# EAGLE board auxDaqUnitBottom2022 (EAGLE 9.6.2)
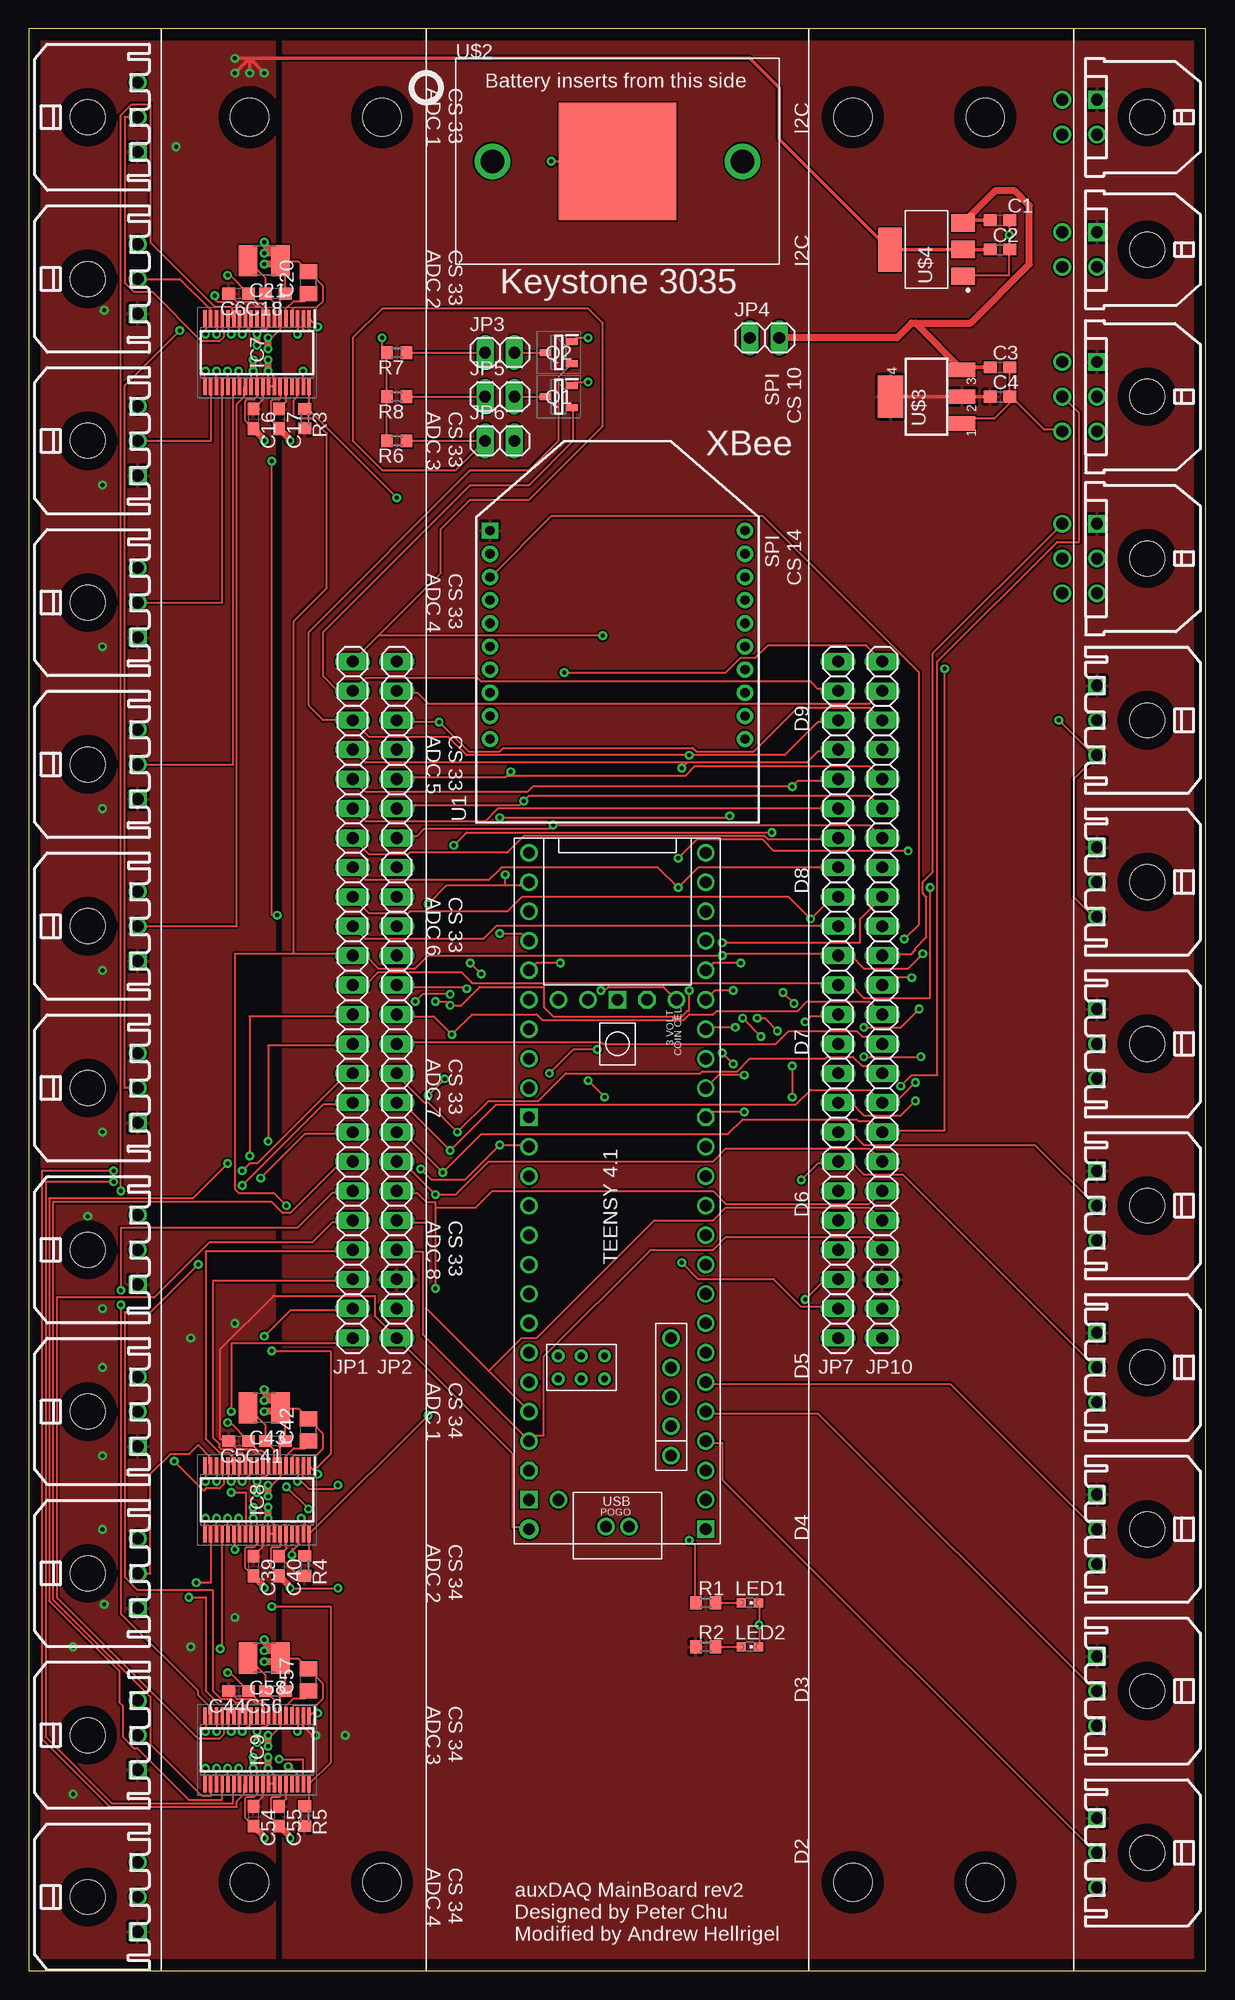
[diagram p0: board, top side]
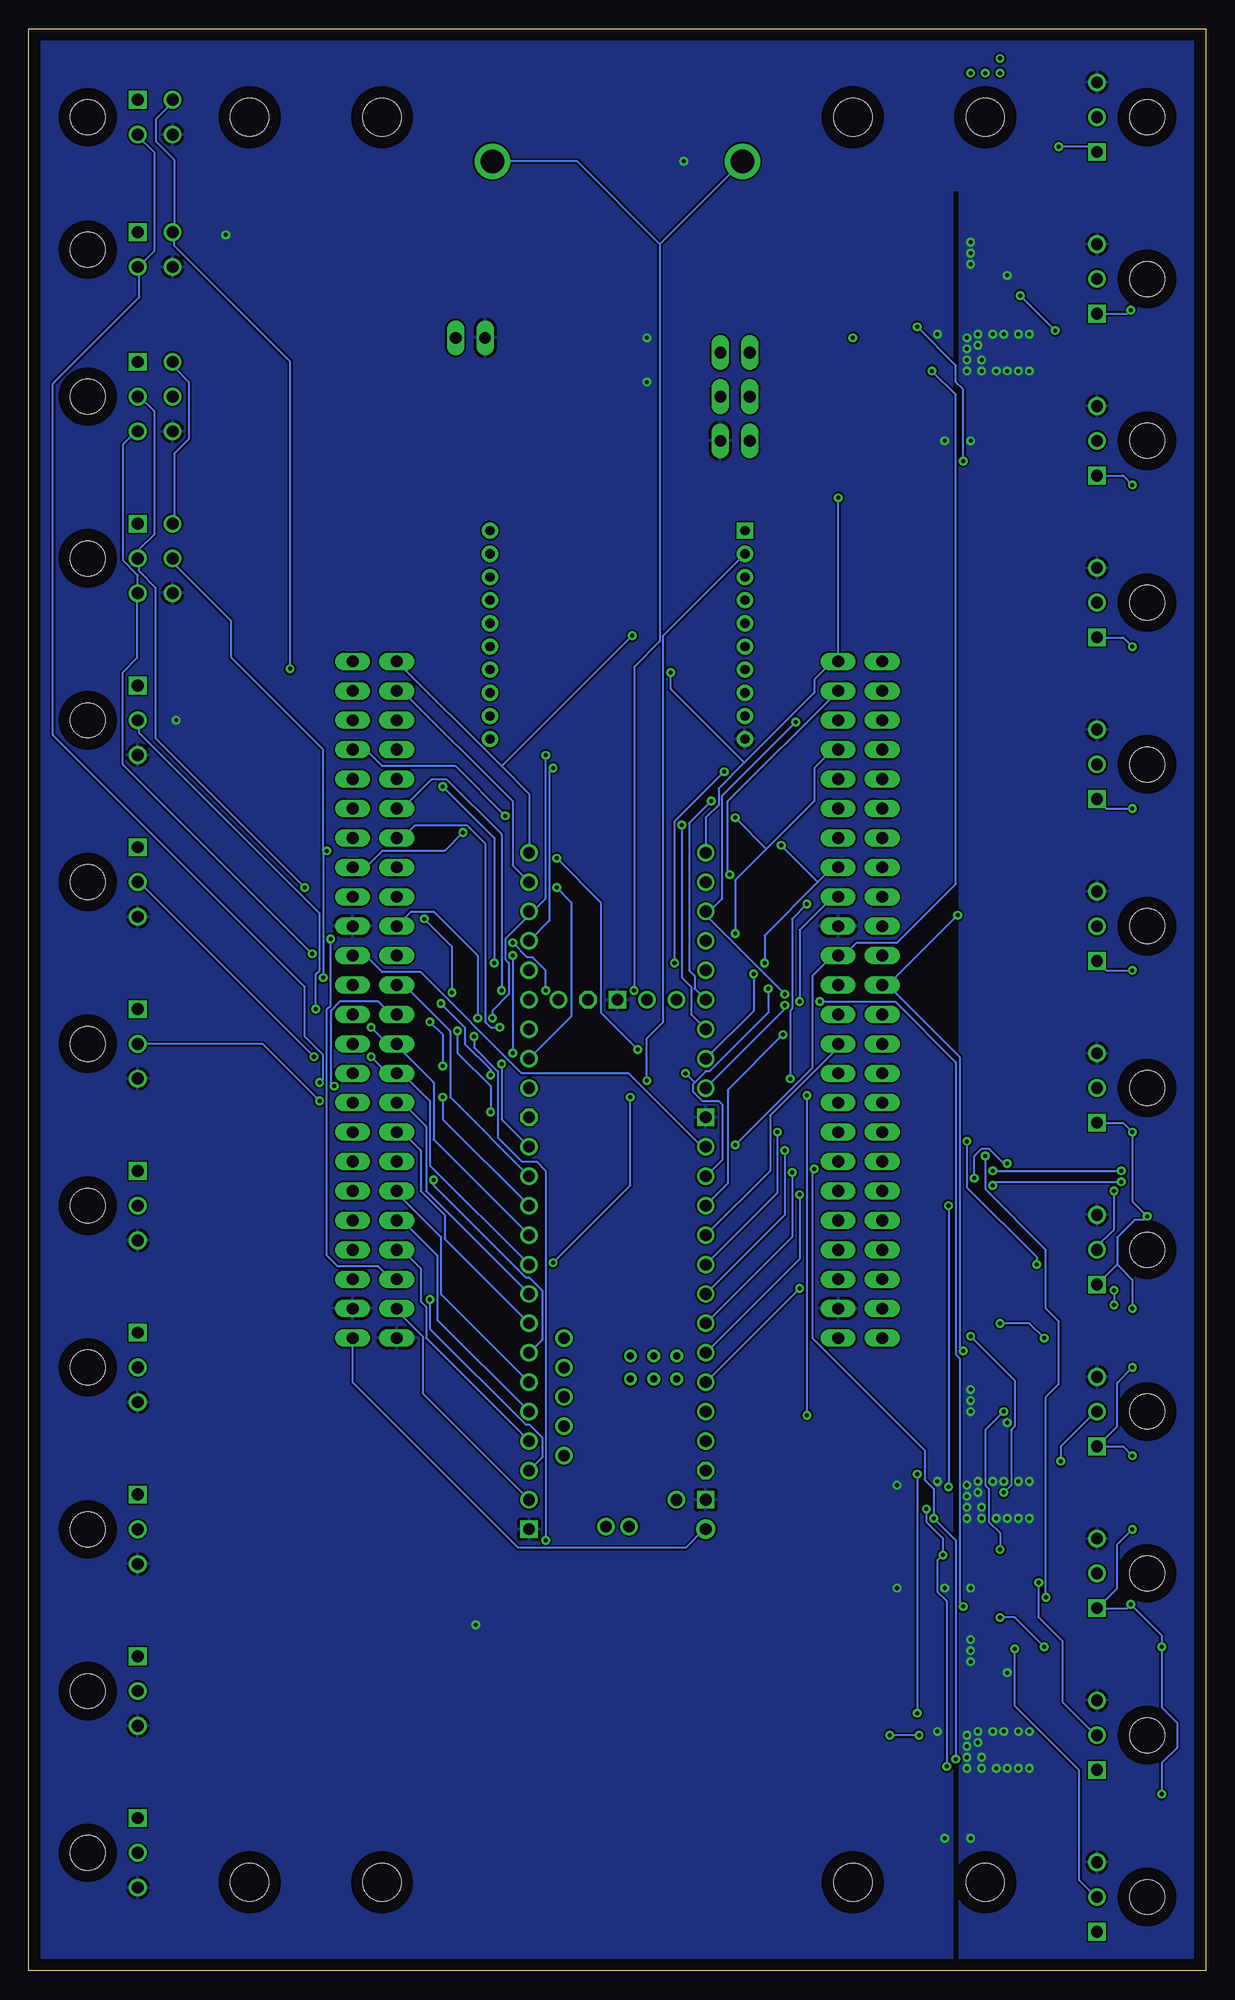
[diagram p1: board, bottom side, seen from below]

Size 101.6 x 167.64 mm. Coordinates in mm from the lower left corner, seen from the top.
Outline: 0,0 101.6,0 101.6,167.64 0,167.64 0,0
Copper layers (1*16): Top 0.035mm / dielectric 1.5mm / Bottom 0.035mm
Design rules "default": minimum track width 6mil, minimum drill 0.35mm, track to track 6mil, track to pad 6mil, pad to pad 6mil, via to via 6mil, smd to smd 6mil, copper to edge 40mil, drill to drill 6mil, minimum pad ring 10mil, minimum via ring 8mil, stop-mask expansion 4mil, vias tented up to drill 0mil, thermal gap 10mil
Holes 3.3 mm at 30.48,160.02 30.48,7.62 82.55,7.62 82.55,160.02 19.05,7.62 71.12,7.62 71.12,160.02 19.05,160.02

## Footprints (pad centres in the part's own frame; a part is rotated, then mirrored left to right if it is on the bottom)
43650-0300 = drill 1.02 square: P$1 3,4.32 | drill 1.02: P$2 0,4.32; P$3 -3,4.32 | hole 3: 0,0
C0603 = smd 1.1 x 1: 1 -0.85,0; 2 0.85,0
C0805 = smd 1.3 x 1.5: 1 -0.95,0; 2 0.95,0
C1210 = smd 1.6 x 2.7: 1 -1.4,0; 2 1.4,0
43045-0600 = drill 1.02 square: P$1 3,4.32 | drill 1.02: P$2 0,4.32; P$3 -3,4.32; P$4 3,7.32; P$5 0,7.32; P$6 -3,7.32 | hole 3: 0,0
43045-0400 = drill 1.02 square: P$1 1.5,4.32 | drill 1.02: P$2 -1.5,4.32; P$3 1.5,7.32; P$4 -1.5,7.32 | hole 3: 0,0
SOP50P640X120-38N = smd 1.475 x 0.3: 1 -2.938,4.5; 2 -2.938,4; 3 -2.938,3.5; 4 -2.938,3; 5 -2.938,2.5; 6 -2.938,2; 7 -2.938,1.5; 8 -2.938,1; 9 -2.938,0.5; 10 -2.938,0; 11 -2.938,-0.5; 12 -2.938,-1; 13 -2.938,-1.5; 14 -2.938,-2; 15 -2.938,-2.5; 16 -2.938,-3; 17 -2.938,-3.5; 18 -2.938,-4; 19 -2.938,-4.5; 20 2.938,-4.5; 21 2.938,-4; 22 2.938,-3.5; 23 2.938,-3; 24 2.938,-2.5; 25 2.938,-2; 26 2.938,-1.5; 27 2.938,-1; 28 2.938,-0.5; 29 2.938,0; 30 2.938,0.5; 31 2.938,1; 32 2.938,1.5; 33 2.938,2; 34 2.938,2.5; 35 2.938,3; 36 2.938,3.5; 37 2.938,4; 38 2.938,4.5
1X24 = drill 1.016 long: 1 -29.21,0; 2 -26.67,0; 3 -24.13,0; 4 -21.59,0; 5 -19.05,0; 6 -16.51,0; 7 -13.97,0; 8 -11.43,0; 9 -8.89,0; 10 -6.35,0; 11 -3.81,0; 12 -1.27,0; 13 1.27,0; 14 3.81,0; 15 6.35,0; 16 8.89,0; 17 11.43,0; 18 13.97,0; 19 16.51,0; 20 19.05,0; 21 21.59,0; 22 24.13,0; 23 26.67,0; 24 29.21,0
1X02 = drill 1.016 long: 1 -1.27,0; 2 1.27,0
LED-603 = smd 0.8 x 0.8: A 0,-0.75; C 0,0.75
BSS64AHZGT116 = smd 1 x 0.6: 1 -1.15,-0.95; 2 -1.15,0.95; 3 1.15,0
R0603 = smd 1 x 1.1: 1 -0.85,0; 2 0.85,0
XBEE_PRO_S3B = drill 0.8 pad 1.4 square: 1 -11,8.75 | drill 0.8 pad 1.4: 2 -11,6.75; 3 -11,4.75; 4 -11,2.75; 5 -11,0.75; 6 -11,-1.25; 7 -11,-3.25; 8 -11,-5.25; 9 -11,-7.25; 10 -11,-9.25; 11 11,-9.25; 12 11,-7.25; 13 11,-5.25; 14 11,-3.25; 15 11,-1.25; 16 11,0.75; 17 11,2.75; 18 11,4.75; 19 11,6.75; 20 11,8.75
TEENSY41 = drill 1: 0-RX1/CS1/CRX2 -27.94,-7.62; 1-TX1/MISO1/CTX2 -25.4,-7.62; 2-OUT2 -22.86,-7.62; 3-LRCLK2 -20.32,-7.62; 4-BCLK2 -17.78,-7.62; 5-IN2 -15.24,-7.62; 6-OUT1D -12.7,-7.62; 7-RX2/OUT1A -10.16,-7.62; 8-TX2/IN2 -7.62,-7.62; 9-OUT1C -5.08,-7.62; 10-CS\MQSR -2.54,-7.62; 11-MOSI/CTX1 0,-7.62; 12-MISO/MQSL 2.54,-7.62; 13-SCK/LED 2.54,7.62; 14-A0/TX3/SPDIF_OUT 0,7.62; 15-A1/RX3/SPDIF_IN -2.54,7.62; 16-A2/RX4/SCL1 -5.08,7.62; 17-A3/TX4/SDA1 -7.62,7.62; 18-A4/SDA0 -10.16,7.62; 19-A5/SCL0 -12.7,7.62; 20-A6/TX5/LRCLK1 -15.24,7.62; 21-A7/RX5/BCLK1 -17.78,7.62; 22-A8/CTX1 -20.32,7.62; 23-A9/CRX1/MCLK1 -22.86,7.62; 24-A10/TX6/SCL2 7.62,-7.62; 25-A11/RX6/SDA2 10.16,-7.62; 26-A12/MOSI1 12.7,-7.62; 27-A13/SCK1 15.24,-7.62; 28-RX7 17.78,-7.62; 29-TX7 20.32,-7.62; 30-CRX3 22.86,-7.62; 31-CTX3 25.4,-7.62; 32-OUT1B 27.94,-7.62; 33-MCLK2 27.94,7.62; 34-RX8 25.4,7.62; 35-TX8 22.86,7.62; 36-PWM 20.32,7.62; 37-PWM 17.78,7.62; 38-A14/CS/IN1 15.24,7.62; 39-A15/CS/OUT1A 12.7,7.62; 40-A16/CS1 10.16,7.62; 41-A17/MISO1 7.62,7.62; +5V -24.13,-4.62; D+ -30.25,-1; D- -30.25,1; DM -21.59,-4.62; DP -19.05,-4.62; GND4 -16.51,-4.62; GND5 -13.97,-4.62; ON/OFF 15.24,5.08; PROGRAM 15.24,2.54; VBAT 15.24,-5.08; VUSB -27.94,5.08 | drill 1 octagon: 3V3-1 5.08,-7.62; 3V3-2 15.24,-2.54; 3V3-3 -25.4,7.62 | drill 0.6: G -15.51,3.12; LED -17.51,3.12; R+ -17.51,5.12; R- -15.51,5.12; T+ -15.51,1.12; T- -17.51,1.12 | drill 1 square: GND1 -30.48,-7.62; GND2 15.24,0; GND3 5.08,7.62; GND6 -27.94,7.62 | drill 1 pad 1.676: VIN -30.48,7.62
KEYSTONE3035 = smd 10.16 x 10.16: NEG 0,0 | drill 2.032: VCC1 -10.795,0; VCC2 10.795,0
SOT223 = smd 1.219 x 2.235: 1 -2.311,-3.099; 2 0,-3.099; 3 2.311,-3.099 | smd 3.6 x 2.2: 4 0,3.099
SOT230P700X180-4N = smd 1.5 x 2: 1 -2.3,-3.15; 2 0,-3.15; 3 2.3,-3.15 | smd 3.8 x 2: 4 0,3.15

## Placement (x,y rotation side)
A0  [43650-0300]  5.08,160.02 270 top
A1  [43650-0300]  5.08,146.05 270 top
A2  [43650-0300]  5.08,132.08 270 top
A3  [43650-0300]  5.08,118.11 270 top
A4  [43650-0300]  5.08,104.14 270 top
A5  [43650-0300]  5.08,90.17 270 top
A6  [43650-0300]  5.08,76.2 270 top
A7  [43650-0300]  5.08,62.23 270 top
A8  [43650-0300]  5.08,48.26 270 top
A9  [43650-0300]  5.08,34.29 270 top
A10  [43650-0300]  5.08,20.32 270 top
A11  [43650-0300]  5.08,6.35 270 top
C1  .1uf  [C0603]  83.82,151.13 0 top
C2  .1uf  [C0603]  83.82,148.59 0 top
C3  .1uf  [C0603]  83.82,138.43 0 top
C4  .1uf  [C0603]  83.82,135.89 0 top
C5  1uF  [C0603]  18.1,45.72 180 top
C6  1uF  [C0603]  18.1,144.78 180 top
C16  1uF  [C0603]  19.37,133.99 270 top
C17  10uF  [C0603]  21.59,133.99 270 top
C18  1uF  [C0603]  21.27,144.78 180 top
C20  10uF  [C0805]  24.13,145.73 90 top
C21  22uF  [C1210]  20.32,147.64 180 top
C39  1uF  [C0603]  19.37,34.92 270 top
C40  10uF  [C0603]  21.59,34.92 270 top
C41  1uF  [C0603]  21.27,45.72 180 top
C42  10uF  [C0805]  24.13,46.67 90 top
C43  22uF  [C1210]  20.32,48.58 180 top
C44  1uF  [C0603]  18.1,24.13 180 top
C54  1uF  [C0603]  19.37,13.34 270 top
C55  10uF  [C0603]  21.59,13.34 270 top
C56  1uF  [C0603]  21.27,24.13 180 top
C57  10uF  [C0805]  24.13,25.08 90 top
C58  22uF  [C1210]  20.32,26.99 180 top
CS=10  [43045-0600]  96.52,135.89 90 top
CS=11  [43045-0600]  96.52,121.92 90 top
D1  [43650-0300]  96.52,10.16 90 top
D2  [43650-0300]  96.52,24.13 90 top
D3  [43650-0300]  96.52,38.1 90 top
D4  [43650-0300]  96.52,52.07 90 top
D5  [43650-0300]  96.52,66.04 90 top
D6  [43650-0300]  96.52,80.01 90 top
D7  [43650-0300]  96.52,93.98 90 top
D8  [43650-0300]  96.52,107.95 90 top
I2C1  [43045-0400]  96.52,160.02 90 top
I2C2  [43045-0400]  96.52,148.59 90 top
IC7  ADC_ADS8688IDBTR  [SOP50P640X120-38N]  19.68,139.7 270 top
IC8  ADC_ADS8688IDBTR  [SOP50P640X120-38N]  19.68,40.64 270 top
IC9  ADC_ADS8688IDBTR  [SOP50P640X120-38N]  19.68,19.05 270 top
JP1  [1X24]  27.94,83.82 90 top
JP2  [1X24]  31.75,83.82 90 top
JP3  [1X02]  40.64,139.7 0 top
JP4  [1X02]  63.5,140.97 0 top
JP5  [1X02]  40.64,135.89 0 top
JP6  [1X02]  40.64,132.08 0 top
JP7  [1X24]  69.85,83.82 90 top
JP10  [1X24]  73.66,83.82 90 top
LED1  AMBER  [LED-603]  62.23,31.75 270 top
LED2  GREEN  [LED-603]  62.23,27.94 270 top
Q1  MOSFET_N-TYPE_RK7002BMT116  [BSS64AHZGT116]  45.72,135.89 180 top
Q2  MOSFET_N-TYPE_RK7002BMT116  [BSS64AHZGT116]  45.72,139.7 180 top
R1  220  [R0603]  58.42,31.75 0 top
R2  220  [R0603]  58.42,27.94 0 top
R3  10k  [R0603]  23.81,133.99 270 top
R4  10k  [R0603]  23.81,34.92 270 top
R5  10k  [R0603]  23.81,13.34 270 top
R6  10k  [R0603]  31.75,132.08 180 top
R7  [R0603]  31.75,139.7 180 top
R8  [R0603]  31.75,135.89 180 top
U1  XBEE_PRO_S3B  [XBEE_PRO_S3B]  50.8,115.57 0 top
U$1  TEENSY41  [TEENSY41]  50.8,68.58 90 top
U$2  KEYSTONE3035  [KEYSTONE3035]  50.8,156.21 0 top
U$3  REG_3V3_LMS8117A  [SOT223]  77.47,135.89 90 top
U$4  REG_5V_LDL1117S50R  [SOT230P700X180-4N]  77.47,148.59 90 top

## Library data of the parts
A0 A1-A11 CS=10 CS=11 D1-D8 I2C1 I2C2 = GTOR - Microfit Connector
C1-C6 C16-C18 C20 C21 C39-C44 C54-C58 = GTOR - Passive Components; SPICEPREFIX: C
IC7-IC9 = GTOR - Active Components; ARROW_PART_NUMBER: ADS8688IDBTR; ARROW_PRICE-STOCK: https://www.arrow.com/en/products/ads8688idbtr/texas-instruments?region=nac; DESCRIPTION: Octal Channel Single ADC SAR 500ksps 16-bit Serial 38-Pin TSSOP T/R; HEIGHT: 1.2mm; MANUFACTURER_NAME: Texas Instruments; MANUFACTURER_PART_NUMBER: ADS8688IDBTR; MOUSER_PART_NUMBER: 595-ADS8688IDBTR; MOUSER_PRICE-STOCK: https://www.mouser.co.uk/ProductDetail/Texas-Instruments/ADS8688IDBTR?qs=bZA2O%252B%252B1GJuPFEagMJIgMw%3D%3D
JP1-JP7 JP10 = GTOR - Connectors
LED1 LED2 U$2 = GTOR - Passive Components
Q1 Q2 = GTOR - Active Components; DESCRIPTION: 2.5V Drive Nch MOSFET: MOSFETs are made as ultra-low ON-resistance by the micro-processing technologies suitable for mobilr equipment for low current consumption. In wide lineup including compact type, high-power type and complex type to meet in the market.; HEIGHT: 1.2mm; MANUFACTURER_NAME: ROHM Semiconductor; MANUFACTURER_PART_NUMBER: RK7002BMT116; MOUSER_PART_NUMBER: 755-RK7002BMT116; MOUSER_PRICE-STOCK: https://www.mouser.co.uk/ProductDetail/ROHM-Semiconductor/RK7002BMT116?qs=npTsUczJOtO4aXz%2Fx%2FNVUw%3D%3D
R1-R8 = GTOR - Passive Components; SPICEPREFIX: R
U1 = GTOR - Microcontroller; DESCRIPTION: General ISM < 1GHz Transceiver Module 900MHz Antenna Not Included, RP-SMA Through Hole; DIGI-KEY_PART_NUMBER: 602-1293-ND; MF: Digi International; MP: XBP9B-XCST-001; PACKAGE: Module Digi International
U$1 = GTOR - Microcontroller
U$3 U$4 = GTOR - Active Components

## Nets
2: D1.P$2 JP7.4 U$1.2-OUT2
3: D2.P$2 JP7.5 U$1.3-LRCLK2
3V3: R6.2 R7.2 R8.2
3V3-1: JP1.15 JP7.15 U$1.3V3-1
3V3-2: U$1.3V3-2
3V3-3: U$1.3V3-3
4: D3.P$2 JP7.6 U$1.4-BCLK2
5: D4.P$2 JP7.7 U$1.5-IN2
5V: U$1.+5V
6: D5.P$2 JP7.8 U$1.6-OUT1D
7: D6.P$2 JP7.9 U$1.7-RX2/OUT1A
8: D7.P$2 JP7.10 U$1.8-TX2/IN2
9: D8.P$2 JP7.11 U$1.9-OUT1C
10: CS=10.P$5 JP7.12 U$1.10-CS\MQSR
14: CS=11.P$5 JP2.13 JP10.13 U$1.14-A0/TX3/SPDIF_OUT
15: JP2.12 JP10.12 U$1.15-A1/RX3/SPDIF_IN
16: JP2.11 JP10.11 U$1.16-A2/RX4/SCL1
17: JP2.10 JP10.10 U$1.17-A3/TX4/SDA1
20: JP2.7 JP10.7 U$1.20-A6/TX5/LRCLK1
21: JP2.6 JP10.6 U$1.21-A7/RX5/BCLK1
22: JP2.5 JP10.5 U$1.22-A8/CTX1
23: JP2.4 JP10.4 U$1.23-A9/CRX1/MCLK1
24: JP1.16 JP7.16 U$1.24-A10/TX6/SCL2
25: JP1.17 JP7.17 U$1.25-A11/RX6/SDA2
26: JP1.18 JP7.18 U$1.26-A12/MOSI1
27: JP1.19 JP7.19 U$1.27-A13/SCK1
28: JP1.20 JP7.20 U$1.28-RX7
29: JP1.21 JP7.21 U$1.29-TX7
30: JP1.22 JP7.22 Q2.2 R1.1 U$1.30-CRX3
31: JP1.23 JP7.23 Q1.2 U$1.31-CTX3
32: JP1.24 JP6.1 JP7.24 R6.1 U$1.32-OUT1B
33: IC7.38 JP2.24 JP10.24 R3.1 U$1.33-MCLK2
34: IC8.38 JP2.23 JP10.23 R4.1 U$1.34-RX8
35: IC9.38 JP2.22 JP10.22 R5.1 U$1.35-TX8
36: JP2.21 JP10.21 U$1.36-PWM
37: JP2.20 JP10.20 U$1.37-PWM
38: JP2.19 JP10.19 U$1.38-A14/CS/IN1
39: JP2.18 JP10.18 U$1.39-A15/CS/OUT1A
40: JP2.17 JP10.17 U$1.40-A16/CS1
41: JP2.16 JP10.16 U$1.41-A17/MISO1
+3V3: C4.1 C17.1 C40.1 C55.1 CS=10.P$1 CS=11.P$1 D1.P$1 D2.P$1 D3.P$1 D4.P$1 D5.P$1 D6.P$1 D7.P$1 D8.P$1 I2C1.P$1 I2C2.P$1 IC7.2 IC7.34 IC8.2 IC8.34 IC9.2 IC9.34 JP2.3 JP10.3 R2.1 R3.2 R4.2 R5.2 U1.1 U$3.2 U$3.4
+5V: A0.P$1 A1.P$1 A2.P$1 A3.P$1 A4.P$1 A5.P$1 A6.P$1 A7.P$1 A8.P$1 A9.P$1 A10.P$1 A11.P$1 C2.1 C5.2 C6.2 C16.1 C39.1 C44.2 C54.1 IC7.9 IC7.30 IC8.9 IC8.30 IC9.9 IC9.30 JP2.1 JP10.1 U$1.VIN U$4.2 U$4.4
+12V: C1.1 C3.1 JP4.2 U$3.3 U$4.3
ADC1: A0.P$2 IC7.16
ADC2: A1.P$2 IC7.18
ADC3: A2.P$2 IC7.21
ADC4: A3.P$2 IC7.23
ADC5: A4.P$2 IC7.25
ADC6: A5.P$2 IC7.27
ADC7: A6.P$2 IC7.12
ADC8: A7.P$2 IC7.14
ADC9: A8.P$2 IC8.16
ADC10: A9.P$2 IC8.18
ADC11: A10.P$2 IC8.21
ADC12: A11.P$2 IC8.23
ADC13: IC8.25 JP1.1
ADC14: IC8.27 JP1.2
ADC15: IC8.12 JP1.3
ADC16: IC8.14 JP1.4
ADC17: IC9.16 JP1.5
ADC18: IC9.18 JP1.6
ADC19: IC9.21 JP1.7
ADC20: IC9.23 JP1.8
ADC21: IC9.25 JP1.9
ADC22: IC9.27 JP1.10
ADC23: IC9.12 JP1.11
ADC24: IC9.14 JP1.12
D+: U$1.D+
D-: U$1.D-
DM: U$1.DM
DP: U$1.DP
G: U$1.G
GND: A0.P$3 A1.P$3 A2.P$3 A3.P$3 A4.P$3 A5.P$3 A6.P$3 A7.P$3 A8.P$3 A9.P$3 A10.P$3 A11.P$3 C1.2 C2.2 C3.2 C4.2 C5.1 C6.1 C16.2 C17.2 C18.1 C20.2 C21.1 C39.2 C40.2 C41.1 C42.2 C43.1 C44.1 C54.2 C55.2 C56.1 C57.2 C58.1 CS=10.P$6 CS=11.P$6 D1.P$3 D2.P$3 D3.P$3 D4.P$3 D5.P$3 D6.P$3 D7.P$3 D8.P$3 I2C1.P$4 I2C2.P$4 IC7.3 IC7.4 IC7.6 IC7.8 IC7.11 IC7.13 IC7.15 IC7.17 IC7.19 IC7.20 IC7.22 IC7.24 IC7.26 IC7.28 IC7.29 IC7.31 IC7.32 IC7.33 IC8.3 IC8.4 IC8.6 IC8.8 IC8.11 IC8.13 IC8.15 IC8.17 IC8.19 IC8.20 IC8.22 IC8.24 IC8.26 IC8.28 IC8.29 IC8.31 IC8.32 IC8.33 IC9.3 IC9.4 IC9.6 IC9.8 IC9.11 IC9.13 IC9.15 IC9.17 IC9.19 IC9.20 IC9.22 IC9.24 IC9.26 IC9.28 IC9.29 IC9.31 IC9.32 IC9.33 JP2.2 JP2.15 JP4.1 JP6.2 JP7.1 JP10.2 JP10.15 LED1.C LED2.C Q1.1 Q2.1 U1.10 U$1.GND1 U$1.GND2 U$1.GND3 U$1.GND6 U$2.NEG U$3.1 U$4.1
LED: U$1.LED
LED1_GND: JP3.2 Q2.3
LED2_GND: JP5.2 Q1.3
MISO: CS=10.P$3 CS=11.P$3 IC7.36 IC8.36 IC9.36 JP1.14 JP7.14 U$1.12-MISO/MQSL
MOSI: CS=10.P$2 CS=11.P$2 IC7.1 IC8.1 IC9.1 JP1.13 JP7.13 U$1.11-MOSI/CTX1
N$1: LED1.A R1.2
N$2: LED2.A R2.2
N$3: JP3.1 R7.1
N$4: JP5.1 R8.1
N$6: C20.1 IC7.5
N$7: C41.2 C43.2 IC8.7
N$8: IC8.10
N$13: C18.2 C21.2 IC7.7
N$17: IC7.10
N$28: C42.1 IC8.5
N$31: C56.2 C58.2 IC9.7
N$32: IC9.10
N$45: C57.1 IC9.5
NC1: IC7.35
NC2: IC8.35
NC3: IC9.35
PROGRAM: U$1.PROGRAM
R+: U$1.R+
R-: U$1.R-
SCK: CS=10.P$4 CS=11.P$4 IC7.37 IC8.37 IC9.37 JP2.14 JP10.14 U$1.13-SCK/LED
SCL: I2C1.P$3 I2C2.P$3 JP2.8 JP10.8 U$1.19-A5/SCL0
SDA: I2C1.P$2 I2C2.P$2 JP2.9 JP10.9 U$1.18-A4/SDA0
T+: U$1.T+
T-: U$1.T-
VBAT: U$1.VBAT U$2.VCC1 U$2.VCC2
VUSB: U$1.VUSB
XBEE_DIN: JP7.3 U1.3 U$1.1-TX1/MISO1/CTX2
XBEE_DOUT: JP7.2 U1.2 U$1.0-RX1/CS1/CRX2

## Tracks (layer width: path | path; a pad name or v marks a point on that pad's centre or on a via)
2
  Top 0.152: U$1.2-OUT2 58.58,45.56 59.85,45.56 59.85,42.39 92.08,10.16 D1.P$2
  Bottom 0.152: U$1.2-OUT2 67.31,54.61 67.31,57.31 67.79,57.78 67.79,60.64 69.37,62.23 JP7.4
3
  Top 0.152: U$1.3-LRCLK2 58.58,48.1 68.1,48.1 92.08,24.13 D2.P$2
  Bottom 0.152: U$1.3-LRCLK2 66.36,56.2 66.36,61.75 69.37,64.77 JP7.5
3V3  (via drill 0.35)
  Top 0.152: R6.2 R8.2 R7.2 30.48,140.12 v30.48,140.97
3V3-1  (via drill 0.35)
  Top 0.152: U$1.3V3-1 58.9,74.14 v61.75,74.14 | v64.61,81.12 63.5,82.23 v62.87,82.23 | JP1.15 29.05,89.06 39.21,89.06 40.32,90.17 JP7.15
  Bottom 0.152: v61.75,74.14 61.75,76.36 64.61,79.22 v64.61,81.12 | v62.87,82.23 62.87,87.63 66.67,91.44 68.58,91.44 JP7.15
4
  Top 0.152: U$1.4-BCLK2 58.58,50.64 79.53,50.64 92.08,38.1 D3.P$2
  Bottom 0.152: U$1.4-BCLK2 66.04,58.42 66.04,63.34 69.85,67.15 JP7.6
5  (via drill 0.35)
  Top 0.152: v66.67,68.26 68.1,69.69 69.69,69.69 JP7.7 70.96,69.85 72.07,68.74 75.41,68.74 92.08,52.07 D4.P$2
  Bottom 0.152: U$1.5-IN2 57.31,54.45 57.31,58.74 58.42,59.85 58.74,59.85 66.67,67.79 v66.67,68.26
6
  Top 0.152: JP7.8 70.96,72.39 72.07,71.28 86.84,71.28 92.08,66.04 D5.P$2
  Bottom 0.152: U$1.6-OUT1D 65.72,63.18 65.72,65.25 67.79,67.31 67.79,70.8 69.37,72.39 JP7.8
7  (via drill 0.35)
  Top 0.152: v76.52,75.09 75.25,73.82 72.07,73.82 70.96,74.93 JP7.9
  Bottom 0.152: U$1.7-RX2/OUT1A 67.31,67.31 67.31,72.87 69.37,74.93 JP7.9 | D6.P$2 81.44,80.01 v76.52,75.09
8  (via drill 0.35)
  Top 0.152: v72.07,78.9 v76.99,78.9
  Bottom 0.152: U$1.8-TX2/IN2 66.99,69.53 66.99,75.09 69.37,77.47 JP7.10 70.64,77.47 v72.07,78.9 | v76.99,78.9 92.08,93.98 D7.P$2
9  (via drill 0.35)
  Top 0.152: v76.83,83.03 75.25,81.44 v72.07,81.44
  Bottom 0.152: U$1.9-OUT1C 66.67,71.75 66.67,76.68 69.85,79.85 JP7.11 70.64,80.01 v72.07,81.44 | v76.83,83.03 76.83,86.04 76.52,86.36 76.52,91.28 92.08,106.84 92.08,107.95 D8.P$2
10  (via drill 0.35)
  Top 0.152: v65.88,78.11 v65.88,75.41 | v66.99,81.92 67.47,82.39 69.69,82.39 JP7.12 | v75.25,76.36 76.2,77.31 78.42,77.31 78.42,113.03 88.74,123.35 90.65,123.35 90.65,134.46 89.22,135.89 CS=10.P$5
  Bottom 0.152: U$1.10-CS\MQSR 65.88,73.5 v65.88,75.41 | v65.88,78.11 65.88,80.8 v66.99,81.92 | v75.25,76.36 75.56,76.68 75.56,82.87 74.77,83.66 71.44,83.66 70.33,82.55 JP7.12
14  (via drill 0.35)
  Top 0.152: v37.78,84.77 37.62,84.93 31.91,84.93 JP2.13 | JP10.13 74.3,85.72 v76.2,85.72 | v44.93,77.47 46.99,79.53 v49.05,79.53 | v56.04,96.04 57.63,97.63 63.34,97.63 64.29,96.68 v75.88,96.68
  Bottom 0.152: U$1.14-A0/TX3/SPDIF_OUT 41.75,70.01 41.75,74.77 42.07,75.09 43.5,75.09 44.29,75.88 44.29,76.52 44.13,76.68 | 44.13,76.68 43.18,77.63 42.86,77.63 37.78,82.71 v37.78,84.77 | 76.2,96.68 76.2,105.41 84.14,113.35 84.14,116.52 89.06,121.44 89.06,121.92 CS=11.P$5 | 76.2,96.68 v76.2,85.72 | v44.93,77.47 44.13,76.68 | v49.05,79.53 52.23,82.71 52.23,92.23 v56.04,96.04 | 76.2,96.68 v75.88,96.68
15  (via drill 0.35)
  Top 0.152: JP2.12 31.91,82.39 34.92,82.39 v36.51,80.8 38.26,82.55 43.81,82.55 44.29,82.07 56.52,82.07 56.99,82.55 59.05,82.55 59.37,82.87 66.36,82.87 67.15,83.66 72.55,83.66 JP10.12
  Bottom 0.152: U$1.15-A1/RX3/SPDIF_IN 41.27,67.94 41.27,76.04 v36.51,80.8
16
  Top 0.152: JP10.11 73.03,80.64 71.91,80.64 71.44,81.12 65.56,81.12 64.45,80.01 49.53,80.01 49.37,80.17 31.91,80.17 JP2.11
  Bottom 0.152: U$1.16-A2/RX4/SCL1 37.62,69.06 37.62,73.82 31.75,79.69 JP2.11
17  (via drill 0.35)
  Top 0.152: JP2.10 31.75,77.31 34.13,74.93 34.45,74.93 v36.99,72.39 39.69,75.09 43.97,75.09 46.35,77.47 57.94,77.47 58.1,77.63 61.12,77.63 62.23,78.74 68.74,78.74 68.9,78.9 71.12,78.9 71.91,78.11 73.03,78.11 JP10.10
  Bottom 0.152: U$1.17-A3/TX4/SDA1 36.99,67.15 v36.99,72.39
20  (via drill 0.35)
  Top 0.152: JP2.7 32.23,69.85 v35.08,66.99 36.83,66.99 39.69,69.85 59.05,69.85 60.17,70.96 72.55,70.96 JP10.7
  Bottom 0.152: U$1.20-A6/TX5/LRCLK1 35.08,61.44 v35.08,66.99
21  (via drill 0.35)
  Top 0.152: 35.08,65.88 35.08,66.36 34.29,66.36 33.5,67.15 31.91,67.15 JP2.6 | 35.08,65.88 v35.08,58.9 | JP10.6 72.55,66.2 60.17,66.2 59.05,67.31 40.01,67.31 38.58,65.88 35.08,65.88
  Bottom 0.152: v35.08,58.9 U$1.21-A7/RX5/BCLK1
22
  Top 0.152: 39.69,51.75 34.29,57.15 34.29,64.61 31.91,64.61 JP2.5 | 39.69,51.75 U$1.22-A8/CTX1 | JP10.5 72.55,65.88 60.17,65.88 59.05,64.77 53.98,64.77 43.81,54.61 42.55,54.61 39.69,51.75
23
  Top 0.152: 42.7,46.2 33.97,54.93 33.97,62.07 31.91,62.07 JP2.4 | JP10.4 72.55,63.34 60.17,63.34 59.05,62.23 53.66,62.23 44.45,53.02 44.45,46.2 42.7,46.2 | 42.7,46.2 U$1.23-A9/CRX1/MCLK1
24  (via drill 0.35)
  Top 0.152: U$1.24-A10/TX6/SCL2 59.53,77.31 v61.75,77.31 | v65.09,84.45 v66.04,83.5 | JP7.16 69.37,92.71 v67.47,90.81 65.56,92.71 42.55,92.71 41.27,91.44 32.86,91.44 32.7,91.28 29.37,91.28 JP1.16
  Bottom 0.152: v61.75,77.31 61.75,77.79 63.98,80.01 63.98,81.44 v66.04,83.5 | v65.09,84.45 65.09,88.42 v67.47,90.81
25  (via drill 0.35)
  Top 0.152: JP7.17 57.78,95.25 v56.04,93.5 54.29,95.25 40.8,95.25 39.69,94.14 29.05,94.14 JP1.17
  Bottom 0.152: U$1.25-A11/RX6/SDA2 54.77,82.39 54.77,92.23 v56.04,93.5
26  (via drill 0.35)
  Top 0.152: U$1.26-A12/MOSI1 58.58,81.44 v60.96,81.44 | JP1.18 29.37,96.36 32.7,96.36 32.86,96.52 41.27,96.52 42.7,97.95 63.5,97.95 63.82,97.63 69.69,97.63 JP7.18
  Bottom 0.152: v60.96,81.44 61.75,81.44 62.23,81.92 62.23,97.31 63.82,98.9 68.26,98.9 69.37,97.79 JP7.18
27  (via drill 0.35)
  Top 0.152: U$1.27-A13/SCK1 59.21,84.61 v60.8,84.61 | JP1.19 29.05,99.22 39.37,99.22 40.48,100.33 JP7.19
  Bottom 0.152: v60.8,84.61 60.8,98.11 65.56,102.87 66.83,102.87 69.37,100.33 JP7.19
28  (via drill 0.35)
  Top 0.152: U$1.28-RX7 59.05,87 v61.44,87 | JP7.20 69.69,102.71 66.36,102.71 v65.88,102.23 43.5,102.23 43.02,101.76 29.05,101.76 JP1.20
  Bottom 0.152: v61.44,87 61.44,97.79 v65.88,102.23
29  (via drill 0.35)
  Top 0.152: 56.83,104.3 v56.36,103.82 | 56.83,104.3 67.15,104.3 68.1,105.25 69.69,105.25 JP7.21 | JP1.21 29.05,104.3 56.83,104.3
  Bottom 0.152: U$1.29-TX7 56.67,90.65 56.67,103.5 v56.36,103.82
30  (via drill 0.35)
  Top 0.152: JP7.22 69.69,107.79 68.1,107.79 65.25,104.93 v56.99,104.93 37.78,104.93 36.2,106.52 29.37,106.52 JP1.22 25.4,107.95 24.13,109.22 24.13,115.57 38.1,129.54 43.18,129.54 45.72,132.08 45.72,137.6 Q2.2 | v56.99,37.15 57.31,36.83 57.47,36.83 57.47,31.75 R1.1 | v61.59,82.23 v63.18,80.64
  Bottom 0.152: v56.99,37.15 56.99,69.06 57.78,69.85 59.05,69.85 61.12,71.91 61.12,77.63 63.18,79.69 v63.18,80.64 | v61.59,82.23 61.59,82.87 60.17,84.3 60.17,87 60.48,87.31 60.48,89.06 58.42,91.12 | v56.99,104.93 56.99,92.55 58.42,91.12 | 58.42,91.12 U$1.30-CRX3
31
  Top 0.152: JP7.23 69.69,110.65 68.1,110.65 67.47,111.28 39.05,111.28 38.73,111.6 29.05,111.6 JP1.23 26.67,110.49 25.4,111.76 25.4,115.57 38.1,128.27 43.18,128.27 46.99,132.08 46.99,134.82 Q1.2
  Bottom 0.152: U$1.31-CTX3 59.85,95.41 59.85,100.97 69.37,110.49 JP7.23
32  (via drill 0.35)
  Top 0.152: JP1.24 30.16,115.25 | v49.53,115.25 30.16,115.25 | R6.1 JP6.1 36.83,129.54 30.48,129.54 27.94,132.08 27.94,140.97 30.48,143.51 48.26,143.51 49.53,142.24 49.53,133.35 43.18,127 38.1,127 35.56,124.46 35.56,120.65 30.16,115.25
  Bottom 0.152: U$1.32-OUT1B 58.42,101.6 60.8,103.98 | JP7.24 60.8,103.98 | 60.8,103.98 v49.53,115.25
33  (via drill 0.35)
  Top 0.152: IC7.38 24.18,135.21 R3.1 23.97,134.94 v31.75,127.16 | JP10.24 72.23,114.46 63.82,114.46 62.71,113.35 61.44,113.35 60.17,112.08 v46.2,112.08
  Bottom 0.152: 31.75,113.51 v31.75,127.16 | U$1.33-MCLK2 43.18,99.54 42.07,100.65 42.07,102.08 39.85,104.3 | 39.85,104.3 33.81,110.33 33.81,111.44 31.75,113.51 | 31.75,113.51 JP2.24 | v46.2,112.08 46.2,110.65 39.85,104.3
34  (via drill 0.35)
  Top 0.152: R4.1 24.18,36.15 IC8.38 24.29,37.78 v34.45,47.94 | v35.88,76.99 v34.45,75.56 | v34.45,92.08 36.04,93.66 41.12,93.66 | 41.12,93.66 42.39,93.66 42.7,93.98 U$1.34-RX8 | 41.12,93.66 v41.12,94.61 | JP10.23 72.55,109.38 34.45,109.38 33.5,110.33 31.91,110.33 JP2.23
  Bottom 0.152: v34.45,75.56 v34.45,47.94 | v35.88,76.99 35.88,82.87 35.72,83.03 35.72,90.81 v34.45,92.08 | JP2.23 41.27,100.97 41.27,94.77 v41.12,94.61
35  (via drill 0.35)
  Top 0.152: R5.1 24.18,14.56 IC9.38 24.29,16.19 26.04,17.94 26.04,31.43 v20.95,31.43 | v33.34,83.66 33.97,84.3 v36.35,84.3 | JP2.22 31.91,107.79 v35.4,107.79 37.94,105.25 40.64,105.25 40.96,105.57 57.31,105.57 57.63,105.25 62.55,105.25 66.36,109.06 72.55,109.06 JP10.22
  Bottom 0.152: v20.95,31.43 21.27,31.75 21.27,52.86 21.59,53.18 21.59,78.42 26.83,83.66 v33.34,83.66 | 43.18,91.12 v36.35,84.3 | v35.4,107.79 41.75,101.44 41.75,92.55 43.18,91.12 | 43.18,91.12 U$1.35-TX8
36  (via drill 0.35)
  Top 0.152: U$1.36-PWM 42.55,89.53 v40.64,89.53 | v60.48,99.69 60.33,99.54 v40.64,99.54
  Bottom 0.152: v40.64,89.53 40.64,94.14 37.94,96.84 | 37.94,96.84 33.81,100.97 33.81,103.82 32.23,105.41 JP2.21 | JP10.21 72.55,105.41 71.12,103.98 64.77,103.98 v60.48,99.69 | 37.94,96.84 v40.64,99.54
37  (via drill 0.35)
  Top 0.152: U$1.37-PWM 43.81,87 v45.88,87 | 41.27,103.19 41.12,103.03 31.91,103.03 JP2.20 | 41.27,103.19 v41.59,103.5 | JP10.20 72.55,103.98 57.47,103.98 56.67,103.19 41.27,103.19
  Bottom 0.152: v45.88,87 45.88,99.22 v41.59,103.5
38  (via drill 0.35)
  Top 0.152: JP2.19 33.02,100.33 33.34,100.65 42.39,100.65 v42.7,100.97 43.18,101.44 72.55,101.44 JP10.19
  Bottom 0.152: U$1.38-A14/CS/IN1 44.13,84.77 44.13,85.88 44.61,86.36 44.61,99.06 v42.7,100.97
39  (via drill 0.35)
  Top 0.152: JP2.18 31.91,97.95 33.5,97.95 34.13,98.58 44.93,98.58 v45.24,98.9 72.55,98.9 JP10.18
  Bottom 0.152: U$1.39-A15/CS/OUT1A 44.45,82.55 44.45,84.93 45.24,85.72 v45.24,98.9
40  (via drill 0.35)
  Top 0.152: v38.1,87 v39.05,86.04 | v64.14,98.27 37.78,98.27 v36.67,97.16
  Bottom 0.152: U$1.40-A16/CS1 39.05,82.87 v39.05,86.04 | v38.1,87 38.1,89.38 33.5,93.98 | 33.5,93.98 32.23,95.25 JP2.17 | JP10.17 72.55,95.25 71.12,96.68 65.72,96.68 v64.14,98.27 | 33.5,93.98 v36.67,97.16
41  (via drill 0.35)
  Top 0.152: v35.08,83.66 36.04,83.66 v36.35,83.34 37.31,83.34 38.89,84.93 44.45,84.93 44.45,83.19 45.24,82.39 56.36,82.39 56.83,82.87 56.99,82.87 v56.99,84.61 | JP10.16 71.75,90.81 71.75,88.74 v59.85,88.74
  Bottom 0.152: U$1.41-A17/MISO1 36.35,83.03 v36.35,83.34 | v35.08,83.66 35.08,89.85 32.23,92.71 JP2.16 | v59.85,88.74 58.58,87.47 58.1,87.47 56.99,86.36 v56.99,84.61
+3V3  (via drill 0.35)
  Top 0.152: C55.1 22.23,14.82 22.23,16.07 IC9.34 | IC8.34 22.23,37.66 22.23,36.41 C40.1 23.29,34.08 R4.2 | C17.1 22.23,135.47 22.23,136.72 IC7.34 | IC9.2 23.65,21.91 23.65,21.11 24.45,20.32 v24.77,20.32 | IC8.2 23.65,43.5 23.65,42.7 23.81,42.55 23.78,42.48 | IC7.2 23.65,142.56 23.65,141.76 23.81,141.6 23.78,141.54
  Top 0.305: C4.1 U$3.2 U$3.4
  Bottom 0.152: v24.77,20.32 v27.3,20.32
  pour Top: 21.91,167.64 21.91,0 101.6,0 101.6,167.64
+5V  (via drill 0.35)
  Top 0.152: IC9.30 20.18,15 C54.1 | IC9.9 20.18,22.79 19.95,23.02 19.62,23.02 19.25,23.4 17.98,23.4 C44.2 | IC8.30 20.18,36.59 C39.1 | IC8.9 20.18,44.38 19.95,44.62 19.62,44.62 19.25,44.99 17.98,44.99 C5.2 17.14,45.72 16.99,45.88 16.51,45.88 16.51,53.66 21.11,58.26 29.84,58.26 29.84,56.52 JP2.1 41.75,44.61 41.75,38.26 43.02,38.26 U$1.VIN | IC7.30 20.18,135.65 C16.1 | IC7.9 20.18,143.44 19.95,143.68 19.62,143.68 19.25,144.05 17.98,144.05 C6.2
  Top 0.305: C2.1 U$4.2 U$4.4 64.77,158.14 64.77,162.56 62.23,165.1 19.05,165.1 | 19.05,165.1 v17.78,165.1 | v17.78,163.83 19.05,165.1 | v19.05,163.83 19.05,165.1 | 19.05,165.1 v20.32,163.83
  Bottom 0.152: JP10.1 73.66,50.8 59.37,36.51 44.93,36.51 43.34,38.1 U$1.VIN | A1.P$1 6.81,143.05 v6.49,143.37 | A2.P$1 7.16,129.08 v6.35,128.27 | A3.P$1 7.16,115.11 v6.35,114.3 | A4.P$1 8.59,100.33 v6.35,100.33 | A5.P$1 8.59,86.36 v6.35,86.36 | A6.P$1 7.16,73.2 v6.35,72.39 6.35,66.39 v5.08,65.12 5.38,64.82 6.15,64.82 7.67,63.3 7.67,60.96 | A7.P$1 7.67,60.96 | 7.67,60.96 6.35,59.64 v6.35,57.15 | v6.35,44.45 7.16,45.26 A8.P$1 7.67,46.99 7.67,50.75 v6.35,52.07 | v13.97,27.94 16.51,30.48 v17.78,30.48 | v3.81,15.24 3.81,17.92 2.49,19.25 2.49,21.39 3.81,22.72 v3.81,27.94 3.81,28.93 v6.49,31.61 6.81,31.29 A9.P$1 7.67,33.02 7.67,36.78 v6.35,38.1 | v13.97,54.61 15.24,55.88 v17.78,55.88 | A0.P$1 9.86,157.48 v12.7,157.48
  pour Top: 0,167.64 0,0 21.27,0 21.27,167.64
+12V
  Top 0.305: U$4.3 80.86,151.13 C1.1 | U$3.3 80.8,138.43 C3.1
  Top 0.61: JP4.2 74.93,140.97 76.2,142.24 76.53,142.24 | 76.53,142.24 U$3.3 | 76.53,142.24 81.28,142.24 86.36,147.32 86.36,152.4 85.09,153.67 83.4,153.67 U$4.3
ADC1
  Top 0.152: IC7.16 16.68,141.65 16.8,141.54 16.8,141.04 16.44,140.68 14.95,140.68 14.92,140.65 10.64,144.94 9.05,144.94 8.26,145.73 8.26,160.02 A0.P$2
ADC2
  Top 0.152: IC7.18 15.69,143.38 13.02,146.05 A1.P$2
ADC3
  Top 0.152: A2.P$2 15.72,132.08 15.72,136.68 IC7.21
ADC4
  Top 0.152: A3.P$2 16.67,118.11 16.67,136.68 IC7.23
ADC5
  Top 0.152: A4.P$2 17.62,104.14 17.62,136.68 IC7.25
ADC6
  Top 0.152: A5.P$2 17.94,90.17 17.94,135.25 18.57,135.89 18.57,136.68 IC7.27
ADC7  (via drill 0.35)
  Top 0.152: IC7.12 18.68,143.48 18.56,143.48 18.29,143.75 17.85,143.75 17.55,144.05 16.29,144.05 15.88,144.46 v16.03,144.62 | v13.02,141.6 8.26,136.84 8.26,76.2 A6.P$2
  Bottom 0.152: v13.02,141.6 v16.03,144.62
ADC8  (via drill 0.35)
  Top 0.152: IC7.14 17.56,142.76 17.56,143.47 17.43,143.6 16.1,143.6 10.48,149.22 10.48,161.13 8.89,161.13 7.94,160.18 v7.94,67.31
  Bottom 0.152: v7.94,67.31 7.94,63.98 9.37,62.55 9.37,62.23 A7.P$2
ADC9  (via drill 0.35)
  Top 0.152: IC8.16 16.68,42.59 16.8,42.48 16.8,41.98 16.44,41.62 15.27,41.62 15.08,41.43 v12.54,43.97
  Bottom 0.152: v12.54,43.97 12.54,45.24 9.53,48.26 A8.P$2
ADC10
  Top 0.152: IC8.18 15.56,43.7 15.56,44.41 14.61,45.37 13.85,44.61 12.22,44.61 10.48,42.86 10.48,34.29 A9.P$2
ADC11  (via drill 0.35)
  Top 0.152: v14.45,33.5 15.72,33.5 15.72,37.62 IC8.21
  Bottom 0.152: v14.45,33.5 14.45,30.48 12.38,28.42 12.38,23.18 9.53,20.32 A10.P$2
ADC12  (via drill 0.35)
  Top 0.152: v16.51,27.78 16.67,27.78 16.67,37.62 IC8.23
  Bottom 0.152: v16.51,27.78 16.51,22.86 10.95,17.3 10.95,7.78 9.53,6.35 A11.P$2
ADC13  (via drill 0.35)
  Top 0.152: v17.78,36.35 17.78,37.62 IC8.25 | v17.46,48.26 17.46,54.13 26.51,54.13 26.99,54.61 JP1.1
  Bottom 0.152: v17.78,36.35 17.78,37.78 18.73,38.73 18.73,41.59 19.05,41.91 19.05,46.67 v17.46,48.26
ADC14  (via drill 0.35)
  Top 0.152: v17.46,41.27 18.73,41.27 18.73,37.78 IC8.27 | v20.32,54.77 22.54,56.99 27.78,56.99 JP1.2
  Bottom 0.152: v17.46,41.27 16.83,41.91 16.83,46.67 16.51,46.99 16.51,50.96 v20.32,54.77
ADC15
  Top 0.152: IC8.12 18.68,44.42 18.41,44.69 17.85,44.69 17.55,44.99 16.6,44.99 16.47,45.12 16.47,45.44 15.88,46.04 15.88,59.53 27.78,59.53 JP1.3
ADC16
  Top 0.152: IC8.14 17.56,43.7 17.56,44.41 17.29,44.69 16.48,44.69 15.24,45.92 15.24,62.07 27.78,62.07 JP1.4
ADC17
  Top 0.152: IC9.16 16.68,21 16.8,20.89 16.8,20.39 16.42,20 14.61,20 2.38,32.23 2.38,58.1 10.79,58.1 15.56,62.87 24.45,62.87 26.19,64.61 27.78,64.61 JP1.5
ADC18  (via drill 0.35)
  Top 0.152: IC9.18 15.56,22.11 15.56,22.82 14.61,23.78 14.61,24.13 7.94,30.8 v7.94,57.47 | v7.94,58.74 7.94,64.14 23.18,64.14 26.19,67.15 27.78,67.15 JP1.6
  Bottom 0.152: v7.94,58.74 v7.94,57.47
ADC19
  Top 0.152: JP1.7 26.99,69.85 22.54,65.41 21.91,65.41 20.95,66.36 2.06,66.36 2.06,32.07 10.48,23.65 10.48,19.53 14.92,15.08 15.72,15.08 15.72,16.03 IC9.21
ADC20  (via drill 0.35)
  Top 0.152: v17.14,69.69 14.13,66.67 1.75,66.67 1.75,31.91 7.78,25.88 7.78,23.18 8.1,22.86 8.1,20.16 9.05,19.21 9.37,19.21 13.81,14.76 16.67,14.76 16.67,16.03 IC9.23 | v20,68.42 23.81,72.23 27.78,72.23 JP1.8
  Bottom 0.152: v17.14,69.69 17.46,69.69 18.73,70.96 19.37,70.96 20,70.33 v20,68.42
ADC21  (via drill 0.35)
  Top 0.152: v7.3,68.1 1.43,68.1 1.43,20.16 7.14,14.45 17.62,14.45 17.62,16.03 IC9.25 | v18.41,67.79 25.4,74.77 27.78,74.77 JP1.9
  Bottom 0.152: v7.3,68.1 18.1,68.1 v18.41,67.79
ADC22  (via drill 0.35)
  Top 0.152: v7.3,69.06 1.11,69.06 1.11,20 6.99,14.13 17.94,14.13 17.94,14.61 18.57,15.24 18.57,16.03 IC9.27 | v18.41,69.06 19.05,69.69 19.68,69.69 27.46,77.47 JP1.10
  Bottom 0.152: v18.41,69.06 v7.3,69.06
ADC23  (via drill 0.35)
  Top 0.152: IC9.12 18.68,22.83 18.41,23.1 17.85,23.1 17.55,23.4 16.6,23.4 16.47,23.54 15.88,24.13 15.88,32.86 9.37,32.86 8.26,33.97 8.26,56.83 10.48,56.83 v14.61,60.96 | v20.64,71.6 20.64,79.85 27.78,79.85 JP1.11
  Bottom 0.152: v14.61,60.96 14.61,61.59 20.64,67.63 v20.64,71.6
ADC24  (via drill 0.35)
  Top 0.152: IC9.14 17.56,22.11 17.56,22.82 17.43,22.95 16.42,22.95 15.24,24.13 15.24,32.23 v13.81,32.23 | v19.05,70.33 19.05,82.39 27.78,82.39 JP1.12
  Bottom 0.152: v13.81,32.23 13.81,49.53 12.7,50.64 12.7,56.04 13.81,57.15 13.81,62.23 19.05,67.47 v19.05,70.33
GND  (via drill 0.35)
  Top 0.152: IC9.4 22.68,22.68 22.95,22.95 24.86,22.95 25.4,23.5 25.4,24.77 C57.2 23.27,26.89 21.81,26.89 | 21.81,26.89 22.12,26.59 C56.1 21.68,23.69 IC9.6 21.68,21.05 20.95,20.32 v20.64,20.32 | 21.81,26.89 C58.1 | IC9.19 15.24,21.93 v15.24,20.64 | IC9.17 16.19,21.98 v16.19,20.64 | IC9.15 17.18,20.91 v17.46,20.64 | IC9.13 18.1,21.9 18.1,20.95 v18.41,20.64 18.8,21.02 18.93,21.02 19.18,21.28 IC9.11 | IC9.20 15.19,17.41 v15.24,17.46 | IC9.22 v16.18,17.45 v16.19,17.46 | IC9.24 17.14,16.15 v17.14,17.46 | IC9.26 18.1,16.2 v18.1,17.46 | v19.68,20.64 20.07,21.02 20.43,21.02 20.68,21.28 IC9.8 | IC9.33 21.68,15.06 21.59,14.96 21,14.96 20.86,14.83 20.86,13.21 C55.2 | IC9.28 19.18,17.28 v19.37,17.46 19.68,17.14 IC9.29 19.68,15.24 19.41,14.96 18.77,14.96 18.64,14.83 18.64,13.21 C54.2 | IC9.3 v23.18,20.64 | IC9.8 20.64,22.04 | IC9.8 20.68,22.72 20.08,23.33 19.75,23.33 C44.1 17.36,25.72 v17.14,25.72 | IC8.4 22.68,44.27 22.95,44.54 24.86,44.54 25.4,45.09 25.4,46.35 C42.2 23.27,48.48 21.81,48.48 | 21.81,48.48 22.12,48.17 C41.1 21.68,45.28 IC8.6 21.68,42.64 20.95,41.91 v20.64,41.91 | 21.81,48.48 C43.1 | IC8.19 15.24,43.52 v15.24,42.23 | IC8.17 16.19,43.57 v16.19,42.23 | IC8.15 17.18,42.51 v17.46,42.23 | IC8.13 18.1,43.49 18.1,42.55 v18.41,42.23 18.8,42.61 18.93,42.61 19.18,42.87 IC8.11 | IC8.20 15.19,39 v15.24,39.05 | IC8.22 v16.18,39.05 v16.19,39.05 | IC8.24 17.14,37.74 v17.14,39.05 | IC8.26 18.1,37.79 v18.1,39.05 | v19.68,42.23 20.07,42.61 20.43,42.61 20.68,42.87 IC8.8 | IC8.33 21.68,36.65 21.59,36.55 21,36.55 20.86,36.42 20.86,34.8 C40.2 | IC8.28 19.18,38.87 v19.37,39.05 19.68,38.73 IC8.29 19.68,36.83 19.41,36.55 18.77,36.55 18.64,36.42 18.64,34.8 C39.2
  Top 0.152: IC8.3 v23.18,42.23 23.5,42.23 24.13,41.59 26.35,41.59 v26.67,41.91 | IC8.8 20.64,43.63 | IC8.8 20.68,44.31 20.08,44.92 19.75,44.92 C5.1 17.36,47.31 v17.14,47.31 | IC7.4 22.68,143.34 22.95,143.6 24.86,143.6 25.4,144.15 25.4,145.41 C20.2 23.27,147.54 21.81,147.54 | 21.81,147.54 22.12,147.24 C18.1 21.68,144.34 IC7.6 21.68,141.7 20.95,140.97 v20.64,140.97 | 21.81,147.54 C21.1 | IC7.19 15.24,142.58 v15.24,141.29 | IC7.17 16.19,142.63 v16.19,141.29 | IC7.15 17.18,141.56 v17.46,141.29 | IC7.13 18.1,142.55 18.1,141.6 v18.41,141.29 18.8,141.67 18.93,141.67 19.18,141.93 IC7.11 | IC7.20 15.19,138.06 v15.24,138.11 | IC7.22 v16.18,138.1 v16.19,138.11 | IC7.24 17.14,136.8 v17.14,138.11 | IC7.26 18.1,136.85 v18.1,138.11 | v19.68,141.29 20.07,141.67 20.43,141.67 20.68,141.93 IC7.8 | IC7.33 21.68,135.71 21.59,135.61 21,135.61 20.86,135.48 20.86,133.86 C17.2 | IC7.28 19.18,137.93 v19.37,138.11 19.68,137.79 IC7.29 19.68,135.89 19.41,135.61 18.77,135.61 18.64,135.48 18.64,133.86 C16.2 | IC7.3 v23.18,141.29 | IC7.8 20.64,142.69 | IC7.8 20.68,143.37 20.08,143.98 19.75,143.98 C6.1 17.36,146.37 v17.14,146.37 | 84.61,148.59 v84.61,149.86 84.61,151.13 C1.2 | 84.61,148.59 84.61,146.37 80.64,146.37 U$4.1 | 84.61,148.59 C2.2 | LED2.C 63.02,27.94 v63.02,29.84 63.02,31.75 LED1.C | C4.2 84.61,135.89 84.61,138.43 C3.2 | 85.09,135.57 87.63,133.03 89.06,133.03 CS=10.P$6 | 85.09,135.57 84.77,135.89 C4.2 | 85.09,135.57 84.93,135.57 83.34,133.99 80.96,133.99 80.64,133.67 U$3.1 | 85.09,135.57 C4.2 | v45.09,156.21 U$2.NEG | D7.P$3 91.9,90.98 90.17,92.71 90.17,102.87 92.2,104.9 D8.P$3 91.9,104.95 v88.9,107.95
  Top 0.152: v22.54,33.02 v26.67,33.02 | Q2.1 47.19,140.97 v48.26,140.97 | Q1.1 47.19,137.16 v48.26,137.16 | IC9.32 IC9.31 20.64,16.16 v20.64,17.46 21.18,16.91 IC9.32 | IC8.32 IC8.31 20.64,37.75 v20.64,39.05 21.18,38.51 IC8.32 | IC7.32 IC7.31 20.64,136.81 v20.64,138.11 21.18,137.56 IC7.32
  Top 0.61: C58.1 21.4,26.67 v20.32,26.67 | C58.1 21.09,27.62 v20.32,27.62 | C58.1 20.32,28.39 v20.32,28.57 | v20.64,19.37 v20.64,20.32 | v20.64,17.46 v20.64,18.41 | v19.37,17.46 v19.37,18.41 | v19.68,19.68 v19.68,20.64 | C55.2 22.54,11.53 v22.54,11.43 | C54.2 20.32,11.53 v20.32,11.43 | C43.1 21.4,48.26 v20.32,48.26 | C43.1 21.09,49.21 v20.32,49.21 | C43.1 20.32,49.98 v20.32,50.16 | v20.64,40.96 v20.64,41.91 | v20.64,39.05 v20.64,40.01 | v19.37,39.05 v19.37,40.01 | v19.68,41.27 v19.68,42.23 | C40.2 22.54,33.12 v22.54,33.02 | C39.2 20.32,33.12 v20.32,33.02 | C21.1 21.4,147.32 v20.32,147.32 | C21.1 21.09,148.27 v20.32,148.27 | C21.1 20.32,149.04 v20.32,149.22 | v20.64,140.02 v20.64,140.97 | v20.64,138.11 v20.64,139.06 | v19.37,138.11 v19.37,139.06 | v19.68,140.34 v19.68,141.29 | C17.2 22.54,132.18 v22.54,132.08 | C16.2 20.32,132.18 v20.32,132.08
  pour Bottom: 0,167.64 0,0 21.27,0 21.27,153.67 21.91,153.67 21.91,0 101.6,0 101.6,167.64
LED1_GND
  Top 0.152: JP3.2 Q2.3
LED2_GND
  Top 0.152: JP5.2 Q1.3
MISO  (via drill 0.35)
  Top 0.152: v59.85,79.22 v60.8,78.26 | v77.15,87.79 75.88,86.52 72.07,86.52 70.96,87.63 JP7.14 69.69,87.79 60.01,87.79 v59.85,87.63 34.45,87.63 33.34,86.52 30.16,86.52 29.05,87.63 JP1.14 27.78,87.79 25.72,87.79 22.86,87.79 | v22.38,17.62 22.54,17.62 23.18,16.99 23.18,16.19 IC9.36 | v22.7,35.88 22.7,36.35 22.86,36.35 23.34,36.83 23.18,36.99 23.18,37.62 IC8.36 | IC7.36 23.18,136.68 23.18,135.89 22.86,135.57 22.86,134.14 23.02,134.14 23.18,133.99 24.45,133.99 25.72,132.72 25.72,119.38 22.86,116.52 22.86,87.79 | v22.23,41.75 v24.13,39.85 | v22.23,66.04 21.11,67.15 18.1,67.15 17.78,67.47 17.78,87.79 22.86,87.79
  Bottom 0.152: CS=10.P$3 92.23,133.03 93.5,131.76 93.5,121.76 92.23,120.49 92.23,119.06 CS=11.P$3 92.23,118.9 92.23,113.35 93.5,112.08 93.5,104.14 v77.15,87.79 | U$1.12-MISO/MQSL 60.8,73.5 v60.8,78.26 | v59.85,87.63 v59.85,79.22 | v22.38,17.62 22.38,31.91 23.18,32.7 23.18,35.4 v22.7,35.88 22.7,37.31 24.13,38.73 v24.13,39.85 | v22.23,66.04 v22.23,41.75
MOSI  (via drill 0.35)
  Top 0.152: v77.79,93.5 77.79,83.98 72.07,83.98 70.96,85.09 JP7.13 69.69,85.25 38.26,85.25 37.31,86.2 30.16,86.2 29.05,85.09 JP1.13 | v24.92,22.23 24.45,22.23 24.29,22.07 IC9.1 | 24.61,43.18 24.29,43.5 IC8.1 | 24.61,43.18 v24.92,42.86 | v24.92,141.92 24.29,142.56 IC7.1 | v20.95,130.33 20.95,91.12 v21.43,91.12 | 24.61,43.18 26.04,44.61 26.04,53.5 v20.95,53.5
  Bottom 0.152: 92.08,121.92 92.08,122.71 90.81,123.98 90.81,134.62 92.08,135.89 CS=10.P$2 | U$1.11-MOSI/CTX1 65.25,75.41 65.25,81.12 69.22,85.09 JP7.13 | 92.08,121.92 92.08,120.81 90.65,119.38 90.65,106.36 v77.79,93.5 | 92.08,121.92 CS=11.P$2 | v24.92,42.86 v24.92,22.23 | v24.92,141.92 21.59,138.59 21.59,137.16 20.95,136.53 v20.95,130.33 | 27.46,85.09 v21.43,91.12 | v20.95,53.5 21.27,53.82 21.27,78.9 27.46,85.09 | 27.46,85.09 JP1.13
N$1
  Top 0.152: R1.2 LED1.A
N$2
  Top 0.152: R2.2 LED2.A
N$3
  Top 0.152: R7.1 JP3.1
N$4
  Top 0.152: R8.1 JP5.1
N$6
  Top 0.152: IC7.5 22.18,143.47 22.86,144.15 23.81,144.15 24.13,144.46 C20.1
N$7
  Top 0.152: IC8.7 21.18,44.96 C41.2 20.42,47.08 C43.2
N$13
  Top 0.152: IC7.7 21.18,144.02 C18.2 20.42,146.13 C21.2
N$28
  Top 0.152: IC8.5 22.18,44.41 22.86,45.09 23.81,45.09 24.13,45.4 C42.1
N$31
  Top 0.152: IC9.7 21.18,23.37 C56.2 20.42,25.48 C58.2
N$45
  Top 0.152: IC9.5 22.18,22.82 22.86,23.5 23.81,23.5 24.13,23.81 C57.1
SCK  (via drill 0.35)
  Top 0.152: v21.59,18.26 23.65,18.26 23.65,16.19 IC9.37 | v23.5,39.05 23.81,38.73 23.81,38.58 23.65,38.42 23.65,37.78 IC8.37 | v23.65,138.11 23.65,136.84 IC7.37 | U$1.13-SCK/LED 43.02,71.28 v40.64,71.28 37.62,68.26 34.77,68.26 v33.81,69.22 | JP10.14 73.82,87.79 76.2,87.79 76.52,88.11 76.52,88.27 77.47,89.22 77.47,92.71 77.15,93.03 77.15,93.98 78.03,94.85 78.03,113.74 89.06,124.78 CS=11.P$4
  Bottom 0.152: v21.59,18.26 21.59,37.15 v23.5,39.05 23.5,41.59 24.29,42.39 24.29,44.93 33.97,54.61 33.97,69.06 v33.81,69.22 | CS=11.P$4 89.06,124.94 89.06,130.97 87.79,132.24 87.79,137.16 89.06,138.43 89.06,138.75 CS=10.P$4 | v23.65,138.11 21.59,136.05 21.59,93.82 26.67,88.74 30.16,88.74 31.27,87.63 JP2.14 32.23,87.63 33.97,85.88 33.97,77.95 v40.64,71.28 | JP10.14 72.55,87.63 71.12,86.2 67.79,86.2 59.05,77.47 49.85,77.47 43.5,71.12 U$1.13-SCK/LED
SCL  (via drill 0.35)
  Top 0.152: JP2.8 32.23,72.39 v35.72,68.9 39.05,72.23 60.33,72.23 61.59,73.5 71.44,73.5 71.6,73.34 72.71,73.34 73.5,72.55 | v79.06,112.39 79.06,72.55 73.5,72.55 | 73.5,72.55 JP10.8
  Bottom 0.152: I2C1.P$3 89.06,161.45 90.65,159.86 90.65,157.96 89.06,156.37 89.06,150.18 I2C2.P$3 89.06,150.02 89.06,148.91 79.06,138.91 v79.06,112.39 | U$1.19-A5/SCL0 35.72,63.34 v35.72,68.9
SDA  (via drill 0.35)
  Top 0.152: JP2.9 32.23,74.93 v36.35,70.8 40.32,74.77 66.2,74.77 67.47,76.04 72.55,76.04 JP10.9 74.77,74.93 v76.52,76.68
  Bottom 0.152: I2C1.P$2 92.23,158.43 90.81,157 90.81,148.43 92.08,147.16 I2C2.P$2 92.08,147 92.08,144.46 99.54,137 99.54,106.68 77.79,84.93 77.79,80.64 76.2,79.06 76.2,76.99 v76.52,76.68 | U$1.18-A4/SDA0 36.35,65.25 v36.35,70.8
VBAT  (via drill 0.35)
  Top 0.152: U$1.VBAT 54.77,84.93 50.01,84.93 49.69,84.61 v49.37,84.61
  Bottom 0.152: v49.37,84.61 49.37,112.55 47.15,114.78 47.15,149.07 | U$2.VCC1 47.15,149.07 | U$2.VCC2 54.29,156.21 47.15,149.07
XBEE_DIN  (via drill 0.35)
  Top 0.152: U1.3 39.85,120.33 45.09,125.57 63.34,125.57 76.83,112.08 76.83,90.33 v75.56,89.06 | v66.99,57.94 68.74,59.69 JP7.3
  Bottom 0.152: v75.56,89.06 75.56,83.34 75.88,83.03 75.88,61.75 74.93,60.8 71.44,60.8 70.33,59.69 JP7.3 | U$1.1-TX1/MISO1/CTX2 57.31,44.29 57.31,46.04 58.42,47.15 58.74,47.15 66.99,55.4 v66.99,57.94
XBEE_DOUT  (via drill 0.35)
  Top 0.152: v49.69,75.41 v48.26,76.83 | v56.36,61.12 57.78,59.69 64.29,59.69 66.67,57.31 69.69,57.31 JP7.2
  Bottom 0.152: v48.26,76.83 48.26,80.49 46.83,81.92 46.83,115.25 39.85,122.24 U1.2 | v49.69,75.41 49.69,67.79 v56.36,61.12 | U$1.0-RX1/CS1/CRX2 67.63,49.85 67.63,54.77 69.85,56.99 JP7.2

## Text on the board
tNames: CS 33 / ADC 1 | I2C | I2C | CS 33 / ADC 2 | Keystone 3035 | SPI / CS 10 | CS 33 / ADC 3 | XBee | SPI / CS 14 | CS 33 / ADC 4 | D9 | CS 33 / ADC 5 | D8 | CS 33 / ADC 6 | D7 | CS 33 / ADC 7 | D6 | CS 33 / ADC 8 | D5 | CS 34 / ADC 1 | D4 | CS 34 / ADC 2 | D3 | CS 34 / ADC 3 | D2 | CS 34 / ADC 4 | auxDAQ MainBoard rev2 / Designed by Peter Chu / Modified by Andrew Hellrigel
tDocu: LED1 | LED2 | Button